# Altium PCB printer_tag_device.PcbDoc (part 3 of 3)
Units mm, origin at the board's own origin, x right, y up, seen from the top; angles counter-clockwise.
Board outline 140.18 x 100.02 mm, 2 copper layers (Top Layer, Bottom Layer); 258 components, 169 nets, 954 pads, 344 vias.
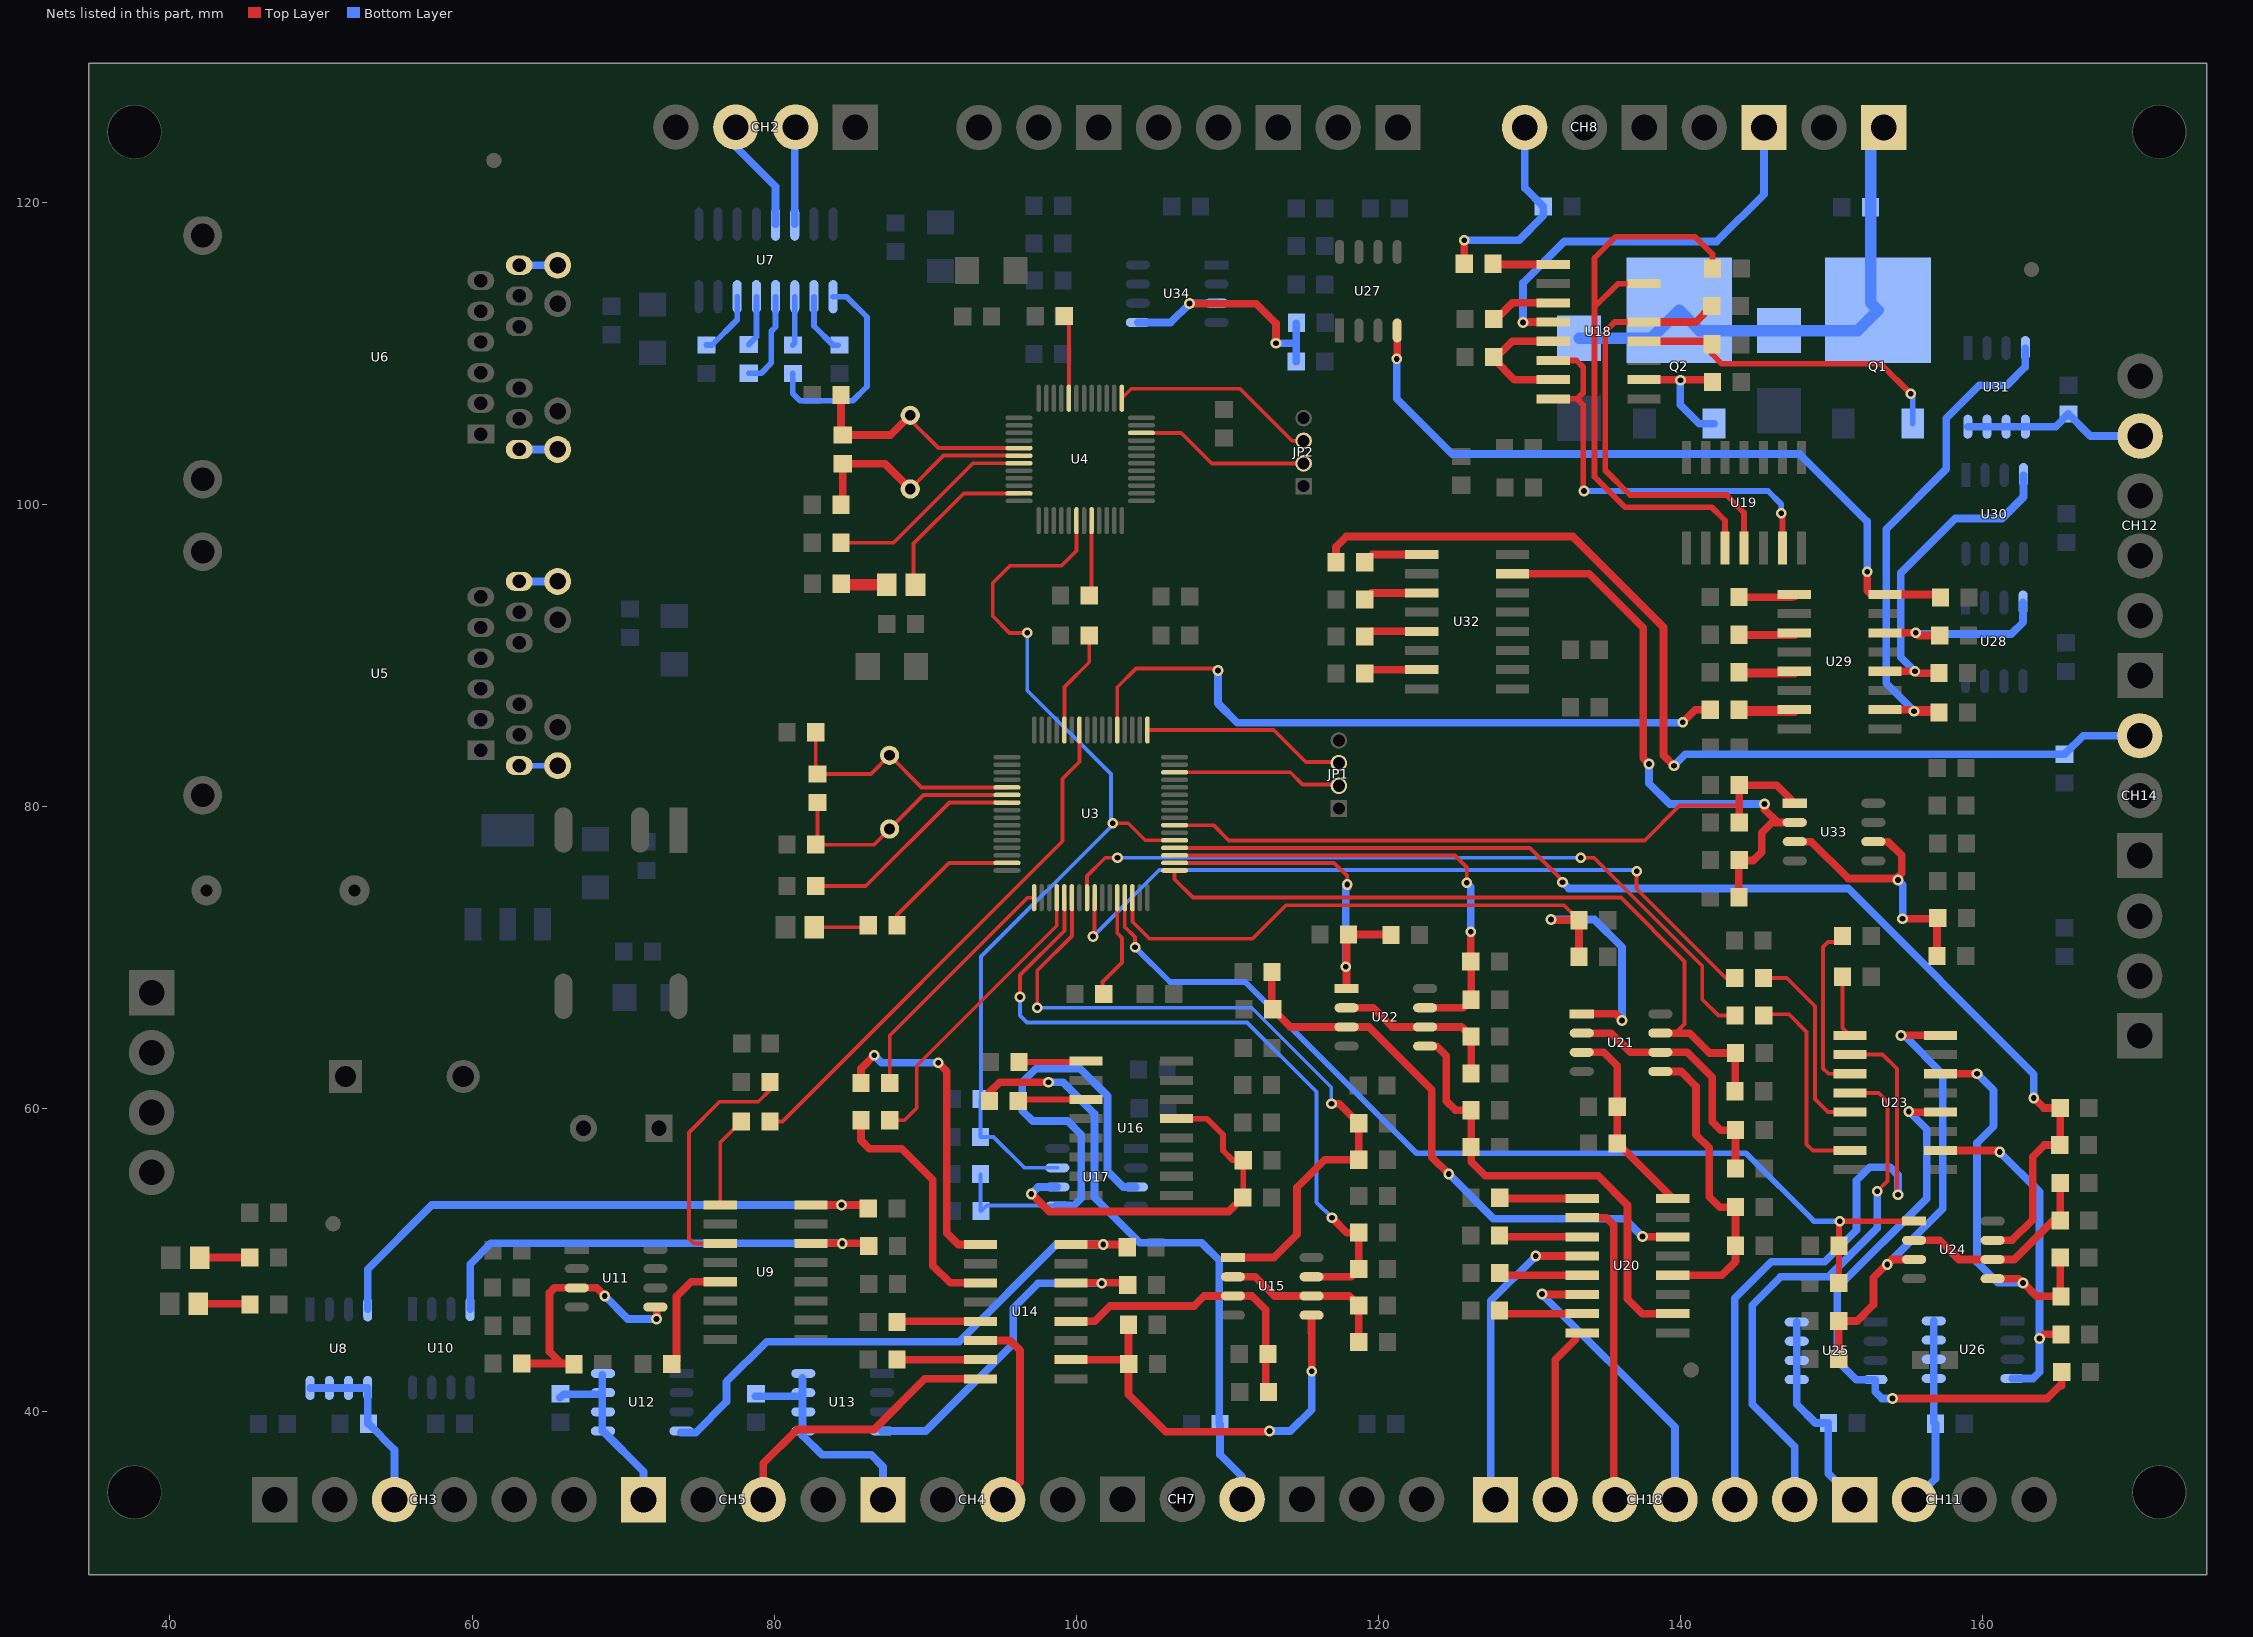
[diagram p3: the nets of this part, all layers, seen from the top]

## Via types
v1: diameter 0.711, hole 0.381, Top Layer to Bottom Layer, 231 vias
v2: diameter 1.27, hole 0.762, Top Layer to Bottom Layer, 107 vias
v3: diameter 3.4, hole 3.4, Top Layer to Bottom Layer, 4 vias
v4: diameter 0.711, hole 0.305, Top Layer to Bottom Layer, 1 vias
v5: diameter 0.762, hole 0.508, Top Layer to Bottom Layer, 1 vias

## Nets (pads, with @x,y where several pads share a name; then routed paths per layer and width w, separated by ;. In a path a pad name is that pad's centre, name@x,y a point inside that pad or via, vN(x,y) a via of type N, cw(c..) or ccw(c..) an arc to the next point about the centre after c; other vN are vias at no path point) (continued)
GREEN_LIGHT_IN: R25.2 U3.20 | length 19.9
  Top Layer w0.254: R25.2@87.64,59.258 88.621,59.258 89.433,60.071 89.433,62.865 98.702,72.134 U3.20@98.702,73.987
GREEN_LIGHT_OUT: C37.1 CH4.1 U13.5 U13.6 U13.7 U13.8 | length 15.6
  Bottom Layer w0.508: C37.1@78.74,40.98 U13.7@81.81,40.98 ; 81.871,38.379 81.871,40.919 U13.7@81.81,40.98 ; 81.871,42.189 81.871,41.041 U13.7@81.81,40.98 ; U13.5@81.922,38.684 81.922,38.347 83.16,37.109 86.411,37.109 87.198,36.322 CH4.1@87.198,34.138
K1: R45.1 U18.13 U19.4 | length 29.6
  Top Layer w0.381: U18.13@137.569,112.09 135.636,112.09 135.001,111.455 135.001,102.286 136.652,100.635 143.027,100.635 144.196,99.466 U19.4@144.196,97.127
  Top Layer w0.508: U18.13@137.569,112.09 140.985,112.09 R45.1@142.052,113.157
KIN1: CH9.1 U18.4 | length 27.4
  Top Layer w0.508: v1(129.565,112.065) 129.591,112.09 U18.4@131.569,112.09
  Bottom Layer w0.508: v1(129.565,112.065) 129.565,114.681 132.309,117.424 142.392,117.424 145.517,120.548 CH9.1@145.517,124.968
LED_TEST: R3.1 U3.15 | length 9.4
  Top Layer w0.254: R3.1@88.123,72.161 88.123,72.832 91.577,76.287 U3.15@95.402,76.287
M1: C52.2 CH10.1 D3.1 D4.2 Q1.2 Q2.2 | length 34.3
  Bottom Layer w0.762: D4.2@133.274,111.021 138.056,111.021 Q2.2@139.903,112.868 141.243,111.529 D3.1@146.507,111.529 151.721,111.529 Q1.2@153.06,112.868 152.563,113.366 C52.2@152.563,119.685 152.563,124.089 CH10.1@153.441,124.968
NetC12_2: C12.2 R5.1 U3.5 Y1.1 | length 16.7
  Top Layer w0.254: C12.2@82.75,84.938 82.75,82.296 R5.1@82.867,82.179 86.396,82.179 Y1.1@87.63,83.414 89.757,81.287 U3.5@95.402,81.287
NetC13_2: C13.2 R5.2 U3.6 Y1.2 | length 16.8
  Top Layer w0.254: R5.2@82.867,80.279 82.867,77.612 C13.2@82.75,77.495 86.592,77.495 Y1.2@87.63,78.534 89.883,80.787 U3.6@95.402,80.787
NetC18_2: C18.2 R10.1 U4.5 Y2.1 | length 16
  Top Layer w0.254: Y2.1@89.002,105.918 89.002,105.613 90.868,103.747 U4.5@96.204,103.747
  Top Layer w0.508: C18.2@84.414,107.264 84.414,104.724 R10.1@84.531,104.607 87.691,104.607 Y2.1@89.002,105.918
NetC19_2: C19.2 R10.2 U4.6 Y2.2 | length 16
  Top Layer w0.254: Y2.2@89.002,101.038 91.211,103.247 U4.6@96.204,103.247
  Top Layer w0.508: C19.2@84.414,100 84.531,100.117 R10.2@84.531,102.707 87.332,102.707 Y2.2@89.002,101.038
NetC26_1: C26.1 U7.1 | length 14.2
  Bottom Layer w0.381: C26.1@81.229,108.676 81.229,107.366 81.712,106.883 85.192,106.883 86.131,107.823 86.131,112.42 84.785,113.767 U7.1@83.896,113.767
NetC26_2: C26.2 U7.3 | length 3.2
  Bottom Layer w0.381: C26.2@81.229,110.576 81.356,110.703 U7.3@81.356,113.767
NetC27_2: C27.2 U7.2 | length 4.1
  Bottom Layer w0.381: U7.2@82.626,113.767 82.626,111.836 83.911,110.551 C27.2@84.226,110.551
NetC28_1: C28.1 U7.5 | length 3.4
  Bottom Layer w0.381: C28.1@78.308,110.602 78.816,111.11 U7.5@78.816,113.767
NetC28_2: C28.2 U7.4 | length 6.3
  Bottom Layer w0.381: C28.2@78.308,108.702 79.136,108.702 79.807,109.372 79.807,111.481 80.086,111.76 U7.4@80.086,113.767
NetC29_2: C29.2 U7.6 | length 4.2
  Bottom Layer w0.381: C29.2@75.514,110.576 75.88,110.576 77.546,112.243 U7.6@77.546,113.767
NetLED1_1: LED1.1 R2.1 | length 3.4
  Top Layer w0.508: LED1.1@41.885,47.117 45.253,47.117 R2.1@45.303,47.066
NetLED2_1: LED2.1 R1.1 | length 3.3
  Top Layer w0.508: LED2.1@41.961,50.165 R1.1@45.278,50.165
NetLED3_1: LED3.1 R8.1 | length 3.1
  Top Layer w0.762: R8.1@84.44,94.767 84.516,94.691 LED3.1@87.452,94.691 ; LED3.1@87.287,94.856 LED3.1@87.325,94.894
NetLED3_2: LED3.2 U4.11 | length 11.1
  Top Layer w0.254: LED3.2@89.352,94.691 89.225,94.818 89.225,97.429 92.543,100.747 U4.11@96.204,100.747
NetLED4_2: LED4.2 R3.2 | length 3.6
  Top Layer w0.254: LED4.2@82.647,72.034 86.096,72.034 R3.2@86.223,72.161
NetQ1_1: Q1.1 R49.2 U18.12 | length 21.5
  Top Layer w0.381: R49.2@142.077,110.617 142.077,109.967 142.723,109.322 153.238,109.322 v1(155.219,107.34)
  Top Layer w0.508: U18.12@137.569,110.82 141.874,110.82 R49.2@142.077,110.617
  Bottom Layer w0.381: v1(155.219,107.34) 155.36,107.199 Q1.1@155.36,105.368
NetQ2_1: Q2.1 R50.2 U18.10 | length 8.9
  Top Layer w0.508: U18.10@137.569,108.28 141.95,108.28 R50.2@142.103,108.128
  Bottom Layer w0.508: v1(139.979,108.229) 139.979,106.629 141.24,105.368 Q2.1@142.203,105.368
NetR4_1: R4.1 U3.60 | length 6.9
  Top Layer w0.254: U3.60@99.202,85.087 99.202,87.925 100.848,89.571 R4.1@100.848,91.338
NetR6_2: R6.2 U3.7 | length 14.9
  Top Layer w0.254: R6.2@82.75,74.752 86.055,74.752 91.59,80.287 U3.7@95.402,80.287
NetR7_2: R7.2 U3.28 | length 6.5
  Top Layer w0.254: R7.2@101.737,68.148 101.737,68.412 103.022,69.698 103.022,71.323 102.702,71.643 U3.28@102.702,73.987
NetR9_1: R9.1 U4.20 | length 5
  Top Layer w0.254: R9.1@100.848,93.98 101.004,94.136 U4.20@101.004,98.947
NetR11_2: R11.2 U4.44 | length 5.6
  Top Layer w0.254: R11.2@99.197,112.497 99.504,112.19 U4.44@99.504,107.047
NetR12_2: R12.2 U4.7 | length 14
  Top Layer w0.254: R12.2@84.414,97.485 87.884,97.485 93.146,102.747 U4.7@96.204,102.747
NetR13_1: R13.1 U8.4 U9.16 | length 39.7
  Top Layer w0.508: U9.16@82.426,53.645 85.994,53.645 R13.1@86.223,53.416
  Bottom Layer w0.508: U8.4@53.086,46.736 53.086,49.403 57.328,53.645 v1(84.455,53.645)
NetR14_2: R14.2 U9.1 | length 6.1
  Top Layer w0.254: U9.1@76.426,53.645 76.426,57.792 R14.2@77.815,59.182
NetR15_2: R15.2 U9.14 U10.4 | length 32.1
  Top Layer w0.508: U9.14@82.426,51.105 86.07,51.105 R15.2@86.248,50.927
  Bottom Layer w0.508: U10.4@59.868,46.761 59.868,49.733 61.239,51.105 v1(84.506,51.105)
NetR16_2: R16.2 U9.3 | length 16.3
  Top Layer w0.254: U9.3@76.426,51.105 74.676,51.105 74.346,51.435 74.346,58.445 76.378,60.477 78.943,60.477 79.715,61.25 R16.2@79.715,61.798
NetR17_2: R17.2 U9.5 | length 7.8
  Top Layer w0.508: R17.2@73.34,43.129 73.533,43.322 73.533,47.6 74.498,48.565 U9.5@76.426,48.565
NetR20_2: R20.2 R21.1 U11.3 U11.5 | length 17.3
  Top Layer w0.508: R21.1@63.282,43.155 65.913,43.155 ; R20.2@66.69,43.155 65.913,43.155 ; v1(68.783,47.625) 68.25,48.158 U11.3@66.929,48.158 65.456,48.158 65.126,47.828 65.126,43.942 65.913,43.155 ; U11.5@72.129,46.888 72.212,46.805 v1(72.212,46.101)
  Bottom Layer w0.508: v1(68.783,47.625) 70.307,46.101 v1(72.212,46.101)
NetR22_1: R22.1 U12.4 U14.16 | length 37.7
  Top Layer w0.508: U14.16@99.647,51.029 v1(101.778,51.029) 103.19,51.029 R22.1@103.368,50.851
  Bottom Layer w0.508: U12.4@73.812,38.583 74.803,38.583 76.835,40.615 76.835,41.935 79.502,44.602 92.253,44.602 98.679,51.029 v1(101.778,51.029)
NetR23_1: R23.1 U13.4 U14.14 | length 23.8
  Top Layer w0.508: U14.14@99.647,48.489 103.266,48.489 R23.1@103.393,48.362
  Bottom Layer w0.508: U13.4@87.122,38.684 90.018,38.684 95.809,44.475 95.809,46.812 97.46,48.463 v1(101.676,48.463)
NetR24_1: R24.1 U14.1 | length 20.7
  Top Layer w0.508: R24.1@85.74,61.722 85.74,62.677 v1(86.614,63.551) ; v1(90.856,63.068) 91.415,62.509 91.415,51.791 92.177,51.029 U14.1@93.647,51.029
  Bottom Layer w0.508: v1(86.614,63.551) 87.097,63.068 v1(90.856,63.068)
NetR25_1: R25.1 U14.3 | length 16.5
  Top Layer w0.508: R25.1@85.74,59.258 85.74,57.922 86.284,57.379 88.443,57.379 90.5,55.321 90.5,49.632 91.643,48.489 U14.3@93.647,48.489
NetR26_2: R26.2 U14.5 | length 5.5
  Top Layer w0.508: R26.2@88.123,45.898 88.174,45.949 U14.5@93.647,45.949
NetR29_2: R29.2 R30.2 U15.2 U15.6 | length 11.5
  Top Layer w0.508: U15.2@110.363,48.895 111.836,48.895 113.106,47.625 U15.6@115.563,47.625 118.049,47.625 R29.2@118.684,46.99 R30.2@118.684,44.577
NetR32_2: R32.2 U14.7 | length 5.5
  Top Layer w0.508: R32.2@88.123,43.409 U14.7@93.647,43.409
NetR34_2: R34.2 U16.1 | length 4.5
  Top Layer w0.381: R34.2@96.2,63.119 100.581,63.119 U16.1@100.632,63.17
NetR38_2: R38.2 R39.1 U17.3 U17.5 | length 34.1
  Bottom Layer w0.254: R38.2@93.66,55.685 93.66,53.264 R39.1@93.685,53.238 94.066,53.619 U17.5@98.686,53.619
  Bottom Layer w0.508: 96.342,61.697 97.307,62.662 ; 96.418,61.697 96.418,59.893 97.104,59.207 99.416,59.207 100.33,58.293 100.33,54.102 99.847,53.619 U17.5@98.686,53.619 ; 97.384,62.662 100.254,62.662 102.057,60.858 102.057,55.88 103.099,54.839 U17.3@103.937,54.839
NetR40_2: R40.2 U16.3 | length 4.5
  Top Layer w0.381: R40.2@96.149,60.528 96.251,60.63 U16.3@100.632,60.63
NetR42_2: R42.2 U18.1 | length 4
  Top Layer w0.508: R42.2@127.569,115.951 127.62,115.9 U18.1@131.569,115.9
NetR44_2: R44.2 U18.3 | length 4.4
  Top Layer w0.508: R44.2@127.645,112.141 128.864,113.36 U18.3@131.569,113.36
NetR48_2: R48.2 U18.5 U18.7 | length 8.9
  Top Layer w0.508: U18.7@131.569,108.28 128.991,108.28 127.645,109.626 128.839,110.82 U18.5@131.569,110.82
NetR51_2: R51.2 U20.1 | length 5.5
  Top Layer w0.508: R51.2@128.026,54.127 128.077,54.077 U20.1@133.474,54.077
NetR53_2: R53.2 U20.3 | length 5.5
  Top Layer w0.508: R53.2@128.001,51.638 128.102,51.537 U20.3@133.474,51.537
NetR57_2: R57.2 R59.2 U21.2 U21.6 | length 17.1
  Top Layer w0.508: U21.2@133.452,65.024 135.407,65.024 136.677,63.754 U21.6@138.652,63.754 140.437,63.754 142.088,62.103 142.088,59.157 142.641,58.603 R59.2@143.627,58.603 R57.2@143.627,56.053
NetR58_2: R58.2 R61.2 U22.2 U22.6 | length 11.5
  Top Layer w0.508: U22.2@117.881,66.7 119.634,66.7 120.904,65.43 U22.6@123.081,65.43 125.491,65.43 R58.2@126.126,64.795 R61.2@126.126,62.357
NetR63_2: R63.2 U20.5 | length 5.5
  Top Layer w0.508: R63.2@128.026,49.149 128.179,48.997 U20.5@133.474,48.997
NetR65_2: R65.2 U20.7 | length 5.6
  Top Layer w0.508: R65.2@128.001,46.66 128.204,46.457 U20.7@133.474,46.457
NetR67_2: R67.2 U23.1 | length 4.1
  Top Layer w0.254: R67.2@150.713,68.758 150.713,65.362 U23.1@151.203,64.872
NetR70_2: R70.2 R71.2 U24.2 U24.6 | length 13.7
  Top Layer w0.508: U24.2@155.448,51.308 157.15,51.308 158.42,50.038 U24.6@160.648,50.038 162.077,50.038 164.658,52.619 R70.2@165.115,52.619 R71.2@165.115,55.103
NetR73_2: R73.2 U23.3 | length 11.7
  Top Layer w0.254: R73.2@150.84,71.45 150.434,71.044 149.758,71.044 149.428,70.714 149.428,62.687 149.784,62.332 U23.3@151.203,62.332
NetR75_2: R75.2 U23.12 U25.4 | length 38.9
  Top Layer w0.508: v1(154.026,40.843) 164.109,40.843 ; v1(155.092,59.842) 155.143,59.792 U23.12@157.203,59.792 ; 164.262,40.843 165.09,41.671 ; 165.217,41.671 R75.2@165.217,42.535
  Top Layer w0.762: R75.2@165.217,42.535 R75.2@165.217,42.596
  Bottom Layer w0.508: v1(154.026,40.843) 153.314,40.843 152.883,41.275 U25.4@152.883,42.088 151.613,42.088 150.368,43.332 150.368,48.158 156.286,54.077 156.286,58.649 v1(155.092,59.842)
NetR76_2: R76.2 U23.10 U26.4 | length 23.1
  Top Layer w0.508: U23.10@157.203,57.252 161.011,57.252 v1(161.112,57.15) ; v1(163.754,44.806) 164.033,45.085 R76.2@165.166,45.085
  Bottom Layer w0.508: v1(161.112,57.15) 163.754,54.508 v1(163.754,44.806) 163.754,42.596 163.322,42.164 U26.4@161.95,42.164
NetR77_2: R77.2 U23.5 | length 13
  Top Layer w0.254: R77.2@145.476,68.682 147.015,68.682 148.895,66.802 148.895,60.655 149.758,59.792 U23.5@151.203,59.792
NetR78_2: R78.2 U23.7 | length 13.8
  Top Layer w0.254: R78.2@145.527,66.269 147.168,66.269 148.336,65.1 148.336,57.658 148.742,57.252 U23.7@151.203,57.252
NetR79_2: R79.2 U27.4 U29.16 | length 48.6
  Top Layer w0.508: v1(121.209,109.652) 121.234,109.677 U27.4@121.234,111.531 ; v1(152.349,95.555) 152.349,94.31 152.603,94.056 U29.16@153.52,94.056 156.987,94.056 R79.2@157.14,93.904
  Bottom Layer w0.508: v1@121.209,109.728 v1(121.209,109.652) 121.209,107.01 124.866,103.353 147.879,103.353 152.349,98.882 v1(152.349,95.555)
NetR80_2: R80.2 U28.4 U29.14 | length 12.5
  Top Layer w0.508: U29.14@153.52,91.516 v1(155.55,91.516) 155.727,91.338 R80.2@157.14,91.338
  Bottom Layer w0.508: v1(155.55,91.516) 155.626,91.44 161.874,91.44 162.662,92.227 U28.4@162.662,93.523
NetR81_2: R81.2 U29.1 | length 3.9
  Top Layer w0.508: R81.2@143.85,93.878 147.343,93.878 U29.1@147.368,93.904 ; U29.1@147.52,94.056 U29.1@147.368,93.904 ; U29.1@147.546,93.904 U29.1@147.368,93.904
NetR82_2: R82.2 U29.3 | length 7.4
  Top Layer w0.508: U29.3@147.52,91.516 147.4,91.396 R82.2@143.85,91.396 143.882,91.364 U29.3@147.546,91.364
NetR83_2: R83.2 U29.12 U30.4 | length 22.2
  Top Layer w0.508: U29.12@153.52,88.976 v1(155.499,88.976) 155.626,88.849 R83.2@157.089,88.849
  Bottom Layer w0.508: v1(155.499,88.976) 154.559,89.916 154.559,95.479 158.166,99.085 161.265,99.085 162.687,100.508 U30.4@162.687,101.956
NetR84_2: R84.2 U29.10 U31.4 | length 34.9
  Top Layer w0.508: U29.10@153.52,86.436 156.886,86.436 157.038,86.284 155.499,86.284 v1(155.448,86.335)
  Bottom Layer w0.508: v1(155.448,86.335) 153.594,88.189 153.594,98.374 157.582,102.362 157.582,105.715 159.766,107.899 161.595,107.899 162.814,109.118 U31.4@162.814,110.363
NetR85_2: R85.2 U29.5 | length 7.4
  Top Layer w0.508: U29.5@147.52,88.976 147.457,88.913 R85.2@143.85,88.913 143.939,88.824 U29.5@147.546,88.824
NetR86_2: R86.2 U29.7 | length 7.4
  Top Layer w0.508: U29.7@147.52,86.436 147.514,86.43 R86.2@143.85,86.43 143.996,86.284 U29.7@147.546,86.284
NetR87_2: R87.2 U32.1 | length 4
  Top Layer w0.508: R87.2@119.085,96.19 119.593,96.698 U32.1@122.857,96.698
NetR91_1: R91.1 R93.2 U33.3 U33.6 | length 19.1
  Top Layer w0.508: U33.3@147.549,77.699 148.641,77.699 151.079,75.26 154.28,75.26 154.635,75.616 154.635,76.784 153.721,77.699 U33.6@152.749,77.699 ; v1@154.661,72.619 v1(154.686,72.593) 156.962,72.593 R91.1@156.962,70.129
  Bottom Layer w0.508: v1(154.381,75.159) 154.686,74.854 v1(154.686,72.593)
NetR92_2: R92.2 U32.3 | length 3.9
  Top Layer w0.508: R92.2@119.085,93.734 119.509,94.158 U32.3@122.857,94.158
NetR95_2: R95.2 U32.5 | length 3.9
  Top Layer w0.508: R95.2@119.085,91.279 119.424,91.618 U32.5@122.857,91.618
NetR99_1: R99.1 R101.2 U34.3 U34.5 | length 17.3
  Top Layer w0.508: v1(107.493,113.309) 111.912,113.309 113.208,112.014 v1(113.208,110.693)
  Bottom Layer w0.508: U34.5@104.071,112.065 106.248,112.065 v1(107.493,113.309) 107.518,113.335 U34.3@109.271,113.335 ; v1@113.106,110.795 v1(113.208,110.693) 114.544,110.693 ; R99.1@114.544,109.474 114.544,110.693 ; R101.2@114.544,112.02 114.544,110.693
NetR100_2: R100.2 U32.7 | length 3.9
  Top Layer w0.508: R100.2@119.085,88.824 119.339,89.078 U32.7@122.857,89.078
NetU5_7: U5.7 U5.13 | length 2.5
  Bottom Layer w0.381: U5.7@63.119,82.728 U5.13@65.659,82.728
NetU5_12: U5.12 U5.16 | length 2.5
  Bottom Layer w0.508: U5.12@63.119,94.92 U5.16@65.659,94.92
NetU6_7: U6.7 U6.13 | length 2.5
  Bottom Layer w0.508: U6.7@63.119,103.657 U6.13@65.659,103.657
NetU6_12: U6.12 U6.16 | length 2.5
  Bottom Layer w0.508: U6.12@63.119,115.849 U6.16@65.659,115.849
NetU18_6: U18.6 U18.8 U19.6 | length 28.6
  Top Layer w0.381: U18.8@131.569,107.01 133.147,107.01 ; U18.6@131.569,109.55 133.096,109.55 133.553,109.093 133.553,107.417 133.147,107.01 ; v1(133.604,100.914) 133.553,100.965 133.553,106.604 133.147,107.01 ; v1(146.66,99.441) 146.736,99.365 U19.6@146.736,97.127
  Bottom Layer w0.381: v1(133.604,100.914) 145.771,100.914 146.66,100.025 v1(146.66,99.441)
PRINTER_COLOR_END: C60.2 R64.2 U20.12 U21.5 | length 20.6
  Top Layer w0.508: U21.5@138.652,62.484 140.03,62.484 141.008,61.506 141.008,58.306 141.884,57.429 141.884,54.204 142.585,53.503 C60.2@143.627,53.503 R64.2@143.627,50.952 143.627,49.901 142.723,48.997 U20.12@139.474,48.997
PRINTER_COLOR_END_IN: CH18.4 U20.6 | length 19.9
  Top Layer w0.508: v1(130.81,47.752) 130.835,47.727 U20.6@133.474,47.727
  Bottom Layer w0.508: v1(130.81,47.752) 139.624,38.938 CH18.4@139.624,34.138
PRINTER_COLOR_END_OUT: C53.1 R60.2 U3.33 U21.7 | length 49.6
  Top Layer w0.254: U3.33@106.502,75.787 106.502,75.209 107.721,73.99 136.042,73.99 140.259,69.774 140.259,65.634 139.649,65.024
  Top Layer w0.508: U21.7@138.652,65.024 139.649,65.024 140.589,65.024 141.91,63.703 R60.2@143.627,63.703 143.601,63.678 C53.1@143.601,61.178
PRINTER_COLOR_LESS: C66.2 R68.2 U23.16 U24.3 | length 30.8
  Top Layer w0.508: R68.2@150.454,43.459 C66.2@150.454,45.966 151.68,45.966 152.756,47.041 152.756,48.819 153.975,50.038 U24.3@155.448,50.038 ; v1(154.584,64.872) U23.16@157.203,64.872
  Bottom Layer w0.508: v1(153.67,49.708) 157.353,53.391 157.353,62.306 154.788,64.872 v1(154.584,64.872)
PRINTER_COLOR_LESS_IN: CH18.5 U23.2 | length 43
  Top Layer w0.254: U23.2@151.203,63.602 153.365,63.602 154.305,62.662 154.305,54.407 v1(154.381,54.331)
  Bottom Layer w0.508: CH18.5@143.584,34.138 143.584,47.47 145.999,49.886 149.53,49.886 151.638,51.994 151.638,55.27 152.502,56.134 153.873,56.134 154.381,55.626 v1(154.381,54.331)
PRINTER_COLOR_LESS_OUT: C63.1 R69.2 U3.29 U24.1 | length 67.2
  Top Layer w0.254: U3.29@103.202,73.987 103.202,72.058 103.886,71.374 v1(103.886,70.714)
  Top Layer w0.381: R69.2@150.454,48.472 150.48,48.497 C63.1@150.48,50.952 ; C63.1@150.785,50.648 C63.1@150.48,50.952 ; U24.1@155.448,52.578 v1(150.52,52.578) 150.48,52.537 C63.1@150.48,50.952
  Bottom Layer w0.381: v1(103.886,70.714) 106.197,68.402 111.176,68.402 122.504,57.074 144.323,57.074 148.819,52.578 v1(150.52,52.578)
PRINTER_END: C62.2 R66.2 U20.10 U22.5 | length 31.1
  Top Layer w0.508: U22.5@123.081,64.16 123.85,64.16 124.485,63.525 124.485,60.528 125.095,59.919 R66.2@126.126,59.919 C62.2@126.126,57.48 126.126,56.5 127.051,55.575 134.544,55.575 136.474,53.645 136.474,47.447 137.465,46.457 U20.10@139.474,46.457
PRINTER_END_IN: CH18.2 U20.8 | length 11.2
  Top Layer w0.508: CH18.2@131.697,34.138 131.697,43.409 133.057,44.769
PRINTER_END_OUT: C54.1 R62.2 U3.35 U22.7 | length 31.8
  Top Layer w0.254: U3.35@106.502,76.787 125.067,76.787 125.832,76.022 v1(125.832,74.981)
  Top Layer w0.508: U22.7@123.081,66.7 125.593,66.7 R62.2@126.126,67.234 126.126,69.748 C54.1@126.101,69.774 v1(126.101,71.74) v1@126.086,71.755
  Bottom Layer w0.508: v1(125.832,74.981) 126.101,74.712 v1(126.101,71.74)
PRINTER_ERR: C61.2 R54.2 U20.14 U22.3 | length 37.8
  Top Layer w0.508: R54.2@112.939,69.063 112.939,66.65 C61.2@112.989,66.599 114.158,65.43 U22.3@117.881,65.43 119.355,65.43 123.52,61.265 123.52,56.82 v1(124.638,55.702) ; v1(137.465,51.562) 137.49,51.537 U20.14@139.474,51.537
  Bottom Layer w0.508: v1(124.638,55.702) 127.61,52.73 136.296,52.73 v1(137.465,51.562)
PRINTER_ERR_IN: CH18.1 U20.4 | length 20.6
  Top Layer w0.508: v1(130.404,50.267) U20.4@133.474,50.267
  Bottom Layer w0.508: CH18.1@127.737,34.138 127.432,34.442 127.432,47.295 v1(130.404,50.267)
PRINTER_ERR_OUT: C56.1 R56.2 U3.34 U22.1 | length 24.6
  Top Layer w0.254: U3.34@106.502,76.287 117.058,76.287 117.932,75.413 v1(117.932,74.854) ; v1@117.881,74.803 v1@118.085,74.6
  Top Layer w0.508: U22.1@117.881,67.97 117.881,71.415 R56.2@118.019,71.552 120.792,71.552 C56.1@120.818,71.526
  Bottom Layer w0.508: v1(117.831,69.418) 117.831,74.752 v1(117.932,74.854)
PRINTER_INLINE: C59.2 R52.2 U20.16 U21.3 | length 13.1
  Top Layer w0.508: U21.3@133.452,63.754 134.899,63.754 135.799,62.855 C59.2@135.799,60.147 R52.2@135.799,57.709 135.865,57.709 139.474,54.099 U20.16@139.474,54.077
PRINTER_INLINE_IN: CH18.3 U20.2 | length 20.7
  Top Layer w0.508: U20.2@133.474,52.807 135.077,52.807 135.56,52.324 135.56,34.234 CH18.3@135.657,34.138 CH18.3@135.763,34.244
PRINTER_INLINE_OUT: C55.1 R55.2 U3.30 U21.1 | length 50.4
  Top Layer w0.254: U3.30@103.702,73.987 103.702,72.396 104.826,71.272 111.658,71.272 113.868,73.482 132.273,73.482 R55.2@133.264,72.492
  Top Layer w0.508: v1(131.42,72.542) 131.47,72.492 R55.2@133.264,72.492 C55.1@133.264,70.079 ; U21.1@133.452,66.294 135.687,66.294 v1(136.119,65.862)
  Bottom Layer w0.508: v1(131.42,72.542) 134.29,72.542 136.119,70.714 v1(136.119,65.862)
PRINTER_RESTART_IN: R78.1 U3.24 | length 50.5
  Top Layer w0.254: U3.24@100.702,73.987 100.702,75.429 101.905,76.632 v1(102.718,76.632) ; v1(133.375,76.632) 134.264,76.632 141.427,69.469 141.427,67.259 142.494,66.192 R78.1@143.601,66.192
  Bottom Layer w0.254: v1(102.718,76.632) v1(133.375,76.632)
PRINTER_RESTART_OUT: C69.2 CH11.2 U26.5 U26.6 U26.7 U26.8 | length 12.5
  Bottom Layer w0.508: CH11.2@155.471,34.138 156.86,35.527 C69.2@156.86,39.167 156.75,39.277 U26.5@156.75,42.164 U26.6@156.75,43.434 U26.7@156.75,44.704 U26.8@156.75,45.974
PRINTER_START_IN: R77.1 U3.25 | length 50.6
  Top Layer w0.254: v1(101.092,71.425) 101.202,71.535 U3.25@101.202,73.987 ; v1(137.084,75.743) 137.084,74.574 142.977,68.682 R77.1@143.576,68.682
  Bottom Layer w0.254: v1(101.092,71.425) 105.486,75.819 137.008,75.819 v1(137.084,75.743)
PRINTER_START_OUT: C68.2 CH11.1 U25.5 U25.6 U25.7 U25.8 | length 13.8
  Bottom Layer w0.508: U25.8@147.683,45.898 U25.7@147.683,44.628 U25.6@147.683,43.358 U25.5@147.683,42.088 147.683,40.455 148.92,39.218 C68.2@149.774,39.218 149.774,35.875 CH11.1@151.511,34.138
PRINTER_TAG_END: C67.2 R74.2 U23.14 U24.5 | length 27
  Top Layer w0.508: U23.14@157.203,62.332 v1(159.614,62.332) ; U24.5@160.648,48.768 162.382,48.768 v1(162.662,48.489) 163.551,47.6 C67.2@165.166,47.6 165.115,47.65 R74.2@165.115,50.165
  Bottom Layer w0.508: v1(159.614,62.332) 160.706,61.239 160.706,58.852 159.614,57.76 159.614,49.86 160.985,48.489 v1(162.662,48.489)
PRINTER_TAG_END_IN: CH18.6 U23.4 | length 35.8
  Top Layer w0.254: U23.4@151.203,61.062 153.111,61.062 153.695,60.477 153.695,55.245 v1(153.01,54.559)
  Bottom Layer w0.508: CH18.6@147.544,34.138 147.544,37.648 144.729,40.462 144.729,47.015 146.609,48.895 149.784,48.895 153.01,52.121 v1(153.01,54.559)
PRINTER_TAG_END_OUT: C64.1 R72.2 U3.36 U24.7 | length 78.7
  Top Layer w0.254: U3.36@106.502,77.287 130.028,77.287 132.182,75.133 v1(132.182,75.006)
  Top Layer w0.508: U24.7@160.648,51.308 161.925,51.308 163.297,52.68 163.297,56.845 164.064,57.612 C64.1@165.09,57.612 165.115,57.638 R72.2@165.115,60.071 164.033,60.071 v1(163.373,60.731)
  Bottom Layer w0.508: v1(132.182,75.006) 132.588,74.6 151.079,74.6 163.373,62.306 v1(163.373,60.731)
RED_LIGHT_IN: R24.2 U3.17 | length 16.5
  Top Layer w0.254: R24.2@87.64,61.722 87.64,64.856 96.77,73.987 U3.17@97.202,73.987
RED_LIGHT_OUT: C36.1 CH5.1 U12.5 U12.6 U12.7 U12.8 | length 12.3
  Bottom Layer w0.508: C36.1@65.811,40.879 66.055,41.123 U12.7@68.612,41.123 ; U12.5@68.612,38.684 U12.7@68.612,41.123 ; U12.8@68.612,42.393 U12.7@68.612,41.123 ; U12.5@68.663,38.684 71.349,35.999 CH5.1@71.349,34.138
S11: R43.1 U18.15 U19.3 | length 39.9
  Top Layer w0.381: U18.15@137.569,114.63 135.839,114.63 134.29,113.081 ; R43.1@142.103,115.646 142.103,116.571 140.945,117.729 135.687,117.729 134.29,116.332 134.29,113.081 ; U19.3@142.926,97.127 142.926,98.958 142.049,99.835 136.309,99.835 134.29,101.854 134.29,113.081
SCANNER: C48.2 R41.1 U16.13 U17.6 | length 25.4
  Top Layer w0.381: U16.13@106.632,59.36 108.636,59.36 109.703,58.293 109.703,57.252 110.35,56.604 C48.2@111.039,56.604 111.039,54.178 R41.1@111.013,54.153
  Top Layer w0.508: v1(97.003,54.381) 97.028,54.381 98.196,53.213 110.073,53.213 R41.1@111.013,54.153
  Bottom Layer w0.508: v1(97.003,54.381) 97.46,54.839 U17.6@98.737,54.839
SCANNER_IN: C49.2 CH7.3 R40.1 | length 40.6
  Top Layer w0.508: R40.1@94.249,60.528 94.249,61.102 94.92,61.773 v1(98.146,61.773)
  Bottom Layer w0.508: v1(98.146,61.773) 99.111,61.773 101.194,59.69 101.194,54.153 104.191,51.156 108.28,51.156 109.449,49.987 C49.2@109.449,39.141 ; C49.2@109.51,39.141 109.51,37.109 110.968,35.651 CH7.3@110.968,34.163
SCANNER_OUT: C44.1 R37.2 U3.37 U4.18 U17.7 | length 63.1
  Top Layer w0.254: v1(96.749,91.516) 95.58,91.516 94.463,92.634 94.463,94.818 95.606,95.961 99.009,95.961 100.004,96.956 U4.18@100.004,98.947 ; v1(102.413,78.918) 103.429,78.918 104.56,77.787 U3.37@106.502,77.787
  Bottom Layer w0.254: C44.1@93.66,60.63 R37.2@93.66,58.158 94.522,58.158 96.571,56.109 U17.7@98.737,56.109 ; C44.1@93.685,60.655 93.685,70.089 102.413,78.816 v1(102.413,78.918) 102.286,79.045 102.286,82.169 96.749,87.706 v1(96.749,91.516)
SCANNER_RXD: CH2.2 U7.14 | length 6.4
  Bottom Layer w0.508: U7.14@81.356,118.567 81.356,124.94 CH2.2@81.409,124.993
SCANNER_TXD: CH2.3 U7.13 | length 7.5
  Bottom Layer w0.508: CH2.3@77.449,124.993 77.449,123.693 80.086,121.056 U7.13@80.086,118.567
SIN11: C50.2 CH8.3 R42.1 | length 13.8
  Top Layer w0.508: v1@125.654,117.526 v1(125.669,117.511) R42.1@125.669,115.951
  Bottom Layer w0.508: v1(125.669,117.511) 129.296,117.511 130.901,119.116 C50.2@130.901,119.736 129.672,120.965 CH8.3@129.672,124.968
SPEED11_IN: R14.1 U3.58 | length 34.9
  Top Layer w0.254: R14.1@79.715,59.182 80.543,59.182 99.085,77.724 99.085,81.864 100.202,82.981 U3.58@100.202,85.087
SPEED11_OUT: C31.1 CH3.3 U8.5 U8.6 U8.7 U8.8 | length 11.9
  Bottom Layer w0.508: U8.8@49.276,41.536 U8.7@50.546,41.536 U8.6@51.816,41.536 U8.5@53.086,41.536 C31.1@53.086,39.167 ; C31.1@53.147,39.167 54.859,37.455 CH3.3@54.859,34.138
START_KEY: C41.2 R27.2 U14.12 U15.3 | length 19.5
  Top Layer w0.508: U14.12@99.647,45.949 101.219,45.949 102.235,46.965 107.798,46.965 108.458,47.625 U15.3@110.363,47.625 111.608,47.625 112.522,46.711 112.522,41.463 R27.2@112.71,41.275
START_KEY_IN: CH4.3 U14.6 | length 13.2
  Top Layer w0.508: U14.6@93.647,44.679 95.606,44.679 96.266,44.018 96.266,35.285 CH4.3@95.118,34.138
START_KEY_OUT: C38.2 R28.2 U3.22 U15.1 | length 48.7
  Top Layer w0.254: v1(97.409,66.7) 97.409,69.164 99.702,71.458 U3.22@99.702,73.987
  Top Layer w0.508: U15.1@110.363,50.165 113.055,50.165 114.605,51.714 114.605,54.813 116.434,56.642 C38.2@118.684,56.642 R28.2@118.684,59.055 117.389,60.35 v1(116.891,60.35)
  Bottom Layer w0.254: v1(97.409,66.7) 111.608,66.7 116.865,61.443 v1@116.865,60.198
STOP_KEY: C42.2 R33.2 U14.10 U15.5 | length 28.5
  Top Layer w0.508: U14.10@99.647,43.409 103.19,43.409 R33.2@103.444,43.155 ; C42.2@103.444,45.72 R33.2@103.444,43.155 ; v1(112.776,38.684) 112.725,38.633 105.918,38.633 103.444,41.107 R33.2@103.444,43.155 ; U15.5@115.563,46.355 115.563,45.194 115.57,45.187 v1(115.57,42.647)
  Bottom Layer w0.508: v1(112.776,38.684) 114.148,38.684 115.57,40.107 v1(115.57,42.647)
STOP_KEY_IN: CH5.3 U14.8 | length 19.1
  Top Layer w0.508: CH5.3@79.269,34.138 79.269,36.546 81.509,38.786 86.614,38.786 89.967,42.139 U14.8@93.647,42.139
STOP_KEY_OUT: C39.2 R31.2 U3.21 U15.7 | length 47.4
  Top Layer w0.254: v1(96.266,67.412) 96.266,68.859 99.202,71.796 U3.21@99.202,73.987
  Top Layer w0.508: U15.7@115.563,48.895 118.176,48.895 R31.2@118.684,49.403 C39.2@118.684,51.816 117.907,51.816 v1(116.916,52.807)
  Bottom Layer w0.254: v1(96.266,67.412) 96.266,66.192 96.723,65.735 111.303,65.735 115.9,61.138 115.9,53.823 v1(116.916,52.807)
TCK/SWCLK1: JP1.3 U3.49 | length 13.6
  Top Layer w0.254: U3.49@104.702,85.087 113.059,85.087 115.176,82.97 117.297,82.97 JP1.3@117.373,82.894
TCK/SWCLK2: JP2.3 U4.37 | length 13.7
  Top Layer w0.254: U4.37@103.004,107.047 103.627,107.671 110.82,107.671 114.261,104.23 JP2.3@115.037,104.23
TMS/SWDIO1: JP1.2 U3.46 | length 11.2
  Top Layer w0.254: U3.46@106.502,82.287 114.157,82.287 114.974,81.47 117.297,81.47 JP1.2@117.373,81.394
TMS/SWDIO2: JP2.2 U4.34 | length 11.6
  Top Layer w0.254: U4.34@104.304,104.747 106.937,104.747 108.954,102.73 JP2.2@115.037,102.73
UPPER_REACH: C77.1 R89.2 U32.15 U33.2 | length 38.3
  Top Layer w0.508: U32.15@128.857,95.428 133.934,95.428 137.516,91.846 137.516,83.21 v1(137.897,82.829) ; R89.2@143.85,74.016 143.85,76.448 144.799,76.448 145.364,77.013 145.364,78.283 146.05,78.969 146.406,78.969 ; v1(145.542,80.188) 145.542,79.832 146.406,78.969 ; U33.2@147.549,78.969 146.406,78.969
  Bottom Layer w0.508: v1(137.897,82.829) 137.897,81.559 139.268,80.188 v1(145.542,80.188)
UPPER_REACH_IN: C78.2 CH14.3 R87.1 | length 66.6
  Top Layer w0.508: R87.1@117.185,96.19 117.185,97.221 117.856,97.892 132.867,97.892 138.862,91.897 138.862,83.414 v1(139.548,82.728)
  Bottom Layer w0.508: v1(139.548,82.728) 140.294,83.475 C78.2@165.405,83.475 166.634,84.704 CH14.3@170.383,84.704
UPPER_REACH_OUT: C74.1 R88.1 U3.39 U33.1 | length 45.4
  Top Layer w0.254: U3.39@106.502,78.787 109.072,78.787 110.084,77.775 137.617,77.775 139.929,80.086 143.876,80.086
  Top Layer w0.508: C74.1@143.876,78.956 143.876,80.086 R88.1@143.876,81.439 146.348,81.439 U33.1@147.549,80.239
VACUUM_IN: R86.1 U3.53 | length 45.7
  Top Layer w0.254: U3.53@102.702,85.087 102.702,87.92 103.937,89.154 109.245,89.154 v1(109.372,89.027)
  Top Layer w0.508: v1(140.132,85.598) 140.964,86.43 R86.1@141.95,86.43
  Bottom Layer w0.508: v1(109.372,89.027) 109.372,86.843 110.642,85.573 140.106,85.573 v1(140.132,85.598)
VACUUM_OUT: C73.2 CH12.5 U31.5 U31.6 U31.7 U31.8 | length 12.4
  Bottom Layer w0.508: U31.8@159.004,105.163 U31.7@160.274,105.163 U31.6@161.544,105.163 U31.5@162.814,105.163 164.812,105.163 C73.2@165.659,106.009 167.124,104.544 CH12.5@170.409,104.544
pads on no net: Pad1.1 Pad2.1 Pad3.1 Pad4.1 U1.8 U3.1 U3.2 U3.3 U3.4 U3.8 U3.9 U3.10 U3.11 U3.14 U3.16 U3.26 U3.27 U3.50 U3.54 U3.55 U3.56 U3.62 U4.1 U4.2 U4.3 U4.4 U4.10 U4.14 U4.15 U4.16 U4.17 U4.19 U4.25 U4.26 U4.27 U4.28 U4.38 U4.39 U4.40 U4.41 U4.43 U4.46 U5.1 U5.2 U5.3 U5.5 U5.6 U5.17 U6.1 U6.2 U6.3 U6.5 U6.6 U6.17 U7.7 U7.8 U7.9 U7.10 U9.7 U9.8 U9.9 U9.10 U11.6 U11.7 U16.5 U16.6 U16.7 U16.8 U16.9 U16.10 U16.11 U16.12 U19.1 U19.2 U19.8 U19.9 U19.10 U19.11 U19.12 U19.13
copper on no net: | length 38.3
  Bottom Layer w0.254: 52.324,52.4 ccw(c50.8,52.4) 52.324,52.4 ; 62.967,122.784 ccw(c61.443,122.784) 62.967,122.784 ; 142.215,42.723 ccw(c140.691,42.723) 142.215,42.723 ; 164.744,115.57 ccw(c163.22,115.57) 164.744,115.57
  other v3: 45.339,82.474 45.339,95.174 45.339,103.403 45.339,116.103

## Polygon pours and split planes (outlines as drawn)
GND on Bottom Layer "Top Layer-No Net" (hatched 90Degree grid 0.508 track 0.305, remove dead copper, pour order 7): 34.925,129.413 97.511,129.413 97.638,129.54 97.79,129.388 97.79,118.542 158.115,118.542 158.496,118.161 159.563,117.094 159.563,55.448 68.377,55.448 65.1,58.725 63.779,60.046 63.779,75.946 36.144,75.946 33.223,78.867 34.671,80.315 34.671,129.667
24V0 on Bottom Layer "Top Layer-No Net" (hatched 90Degree grid 0.508 track 0.305, remove dead copper, pour order 8): 34.823,76.429 66.015,76.429 66.421,76.022 66.015,75.616 66.015,57.836 152.451,57.836 154.788,55.499 155.829,56.54 155.829,106.451 94.336,106.451 92.659,108.128 91.745,109.042 91.745,128.524 175.311,128.524 175.971,129.184 174.676,127.889 174.676,29.362 34.569,29.362 33.782,30.15 33.655,30.277 33.655,80.188
GND on Top Layer "Top Layer-No Net" (hatched 90Degree grid 0.508 track 0.305, remove dead copper, pour order 5): 34.696,129.057 91.237,129.057 91.237,109.703 94.234,106.705 94.894,106.045 147.777,106.045 150.114,106.045 154.407,101.752 154.407,57.455 67.97,57.455 66.015,55.499 65.761,55.753 65.761,75.895 34.569,75.895 33.909,76.556 34.188,76.835 34.188,128.397
24V0 on Top Layer "Top Layer-No Net" (hatched 90Degree grid 0.508 track 0.305, remove dead copper, pour order 6): 34.696,76.429 65.354,76.429 65.634,76.149 66.802,74.981 66.802,57.064 154.137,57.064 154.915,56.286 155.169,56.54 155.169,106.299 95.275,106.299 92.786,108.788 91.618,109.957 91.618,128.93 175.184,128.93 175.311,129.057 174.676,128.422 174.676,29.362 35.077,29.362 33.909,30.531 34.315,30.937 34.315,75.895

## Keep-outs
Keep-Out Layer:
  lines w0.2: 35.611,29.185 173.66,29.185 ccw(c173.66,30.328) 174.803,30.328 174.803,128.245 ; 35.751,129.185 ccw(c35.751,128.054) 34.62,128.054 34.62,30.328 ccw(c35.763,30.328) 35.763,29.185 ; 35.751,129.204 173.66,129.204 ; 173.66,129.21 cw(c173.66,128.067) 174.803,128.067

## Silkscreen, mask and mechanical layers (free items; w line width, h text height)
Top Overlay:
  circle w0.254: c50.8,52.4 r1.524
  circle w0.254: c140.691,42.723 r1.524
  circle w0.254: c61.443,122.784 r1.524
  circle w0.254: c163.22,115.57 r1.524
  text "PC COMMUNICATION WITH CPU2" at 43.891,119.761 h0.8
  text "BAF_II" at 91.694,119.329 h0.8
  text "BAF_O" at 119.939,119.329 h0.8
  text "24V0" at 116.053,119.253 h0.8
  text "24V0" at 96.266,119.177 h0.8
  text "+24V" at 99.949,119.177 h0.8
  text "BAFO_I" at 103.454,119.151 h0.8
  text "24V0" at 108.356,119.151 h0.8
  text "+24V" at 111.989,119.151 h0.8
  text "M1" at 153.391,119.101 h0.8
  text "24V0" at 148.742,119.075 h0.8
  text "+3.3V" at 83.82,119.024 h0.8
  text "SIN" at 128.676,119.024 h0.8
  text "KIN" at 144.983,119.024 h0.8
  text "GND" at 72.644,118.999 h0.8
  text "RXD" at 80.569,118.999 h0.8
  text "24V0" at 140.564,118.999 h0.8
  text "24V0" at 132.334,118.923 h0.8
  text "+24V" at 136.474,118.923 h0.8
  text "TXD" at 76.378,118.872 h0.8
  text "CONTROL SCANNER" at 46.279,118.542 h0.8
  text "24V0" at 162.306,107.848 h0.8
  text "GND" at 111.277,107.315 h0.8
  text "VACU" at 162.281,104.14 h0.8
  text "SCLK" at 109.957,102.006 h0.8
  text "SWIO" at 109.957,100.863 h0.8
  text "24V0" at 162.281,99.974 h0.8
  text "+3V3" at 109.906,99.695 h0.8
  text "PC COMMUNICATION WITH CPU1" at 44.552,99.238 h0.8
  text "CONTROL PRINTER" at 47.142,97.866 h0.8
  text "AIR_B" at 162.001,96.393 h0.8
  text "24V0" at 162.56,91.999 h0.8
  text "AIR_C" at 162.001,87.274 h0.8
  text "GND" at 113.386,84.099 h0.8
  text "UPP_R" at 162.077,83.795 h0.8
  text "SCLK" at 112.624,81.763 h0.8
  text "SWIO" at 112.624,80.62 h0.8
  text "+3V3" at 112.573,79.451 h0.8
  text "24V0" at 162.687,79.223 h0.8
  text "+24V" at 162.484,76.149 h0.8
  text "FIT_R" at 162.001,71.018 h0.8
  text "24V0" at 162.509,68.351 h0.8
  text "24V" at 43.815,68.275 h0.8
  text "IN" at 44.12,66.954 h0.8
  text "+24V" at 162.585,64.059 h0.8
  text "24V0" at 44.221,62.738 h0.8 r45
  text "24V" at 43.79,60.173 h0.8
  text "IN" at 44.171,58.852 h0.8
  text "24V0" at 44.069,55.347 h0.8 r45
  text "+24V" at 45.415,39.472 h0.8
  text "24V0" at 49.251,39.472 h0.8
  text "SPEED" at 53.086,39.421 h0.8
  text "24V0" at 65.278,39.421 h0.8
  text "R_LG" at 69.723,39.421 h0.8
  text "G_LG" at 86.106,39.421 h0.8
  text "24V0" at 162.306,39.421 h0.8
  text "DIR" at 57.937,39.395 h0.8
  text "24V0" at 73.558,39.395 h0.8
  text "STOP_K" at 77.241,39.395 h0.8
  text "START_K" at 93.32,39.395 h0.8
  text "24V0" at 99.238,39.395 h0.8
  text "ERR" at 61.595,39.37 h0.8
  text "24V0" at 82.448,39.37 h0.8
  text "24V0" at 89.586,39.37 h0.8
  text "P_RST" at 154.305,39.37 h0.8
  text "24V0" at 158.572,39.37 h0.8
  text "24V0" at 106.832,39.345 h0.8
  text "P_ST" at 150.978,39.345 h0.8
  text "+24V" at 103.53,39.319 h0.8
  text "P_END" at 129.997,39.294 h0.8
  text "P_ERR" at 125.806,39.268 h0.8
  text "P_INL" at 134.341,39.268 h0.8
  text "P_TAG" at 146.609,39.243 h0.8
  text "24V0" at 117.424,39.218 h0.8
  text "P_COL" at 138.43,39.218 h0.8
  text "P_LES" at 142.469,39.218 h0.8
  text "FLUID" at 121.183,39.192 h0.8
  text "SCAN" at 110.211,39.116 h0.8
  text "+24V" at 113.944,39.091 h0.8
Bottom Overlay:
  text "printer_tag_device" at 126.924,77.47 h0.8
  text "2017-2-23(LJW)" at 126.898,75.921 h0.8

## Text inside footprints (layer, text, board x,y; h text height)
C5: Bottom Overlay "+" at 67.158,68.148 h0.8 r180
C7: Bottom Overlay "+" at 68.936,80.772 h0.8 r90
C8: Top Overlay "+" at 92.303,90.043 h0.8 r180
C14: Top Overlay "+" at 89.84,114.732 h0.8
C22: Bottom Overlay "+" at 74.143,95.555 h0.8 r90
C23: Bottom Overlay "+" at 72.695,116.179 h0.8 r90
C25: Bottom Overlay "+" at 90.246,112.548 h0.8 r270
Q1: Bottom Overlay "S" at 151.028,102.653 h0.8; Bottom Overlay "D" at 153.314,102.653 h0.8; Bottom Overlay "G" at 155.6,102.653 h0.8
Q2: Bottom Overlay "S" at 137.871,102.653 h0.8; Bottom Overlay "D" at 140.157,102.653 h0.8; Bottom Overlay "G" at 142.443,102.653 h0.8